# Altium PCB BLDC_Board_Layout.PcbDoc
Units mm, origin at the board's own origin, x right, y up, seen from the top; angles counter-clockwise.
Board outline 92.58 x 56.96 mm, 2 copper layers (Top Layer, Bottom Layer); 99 components, 78 nets, 395 pads, 357 vias.
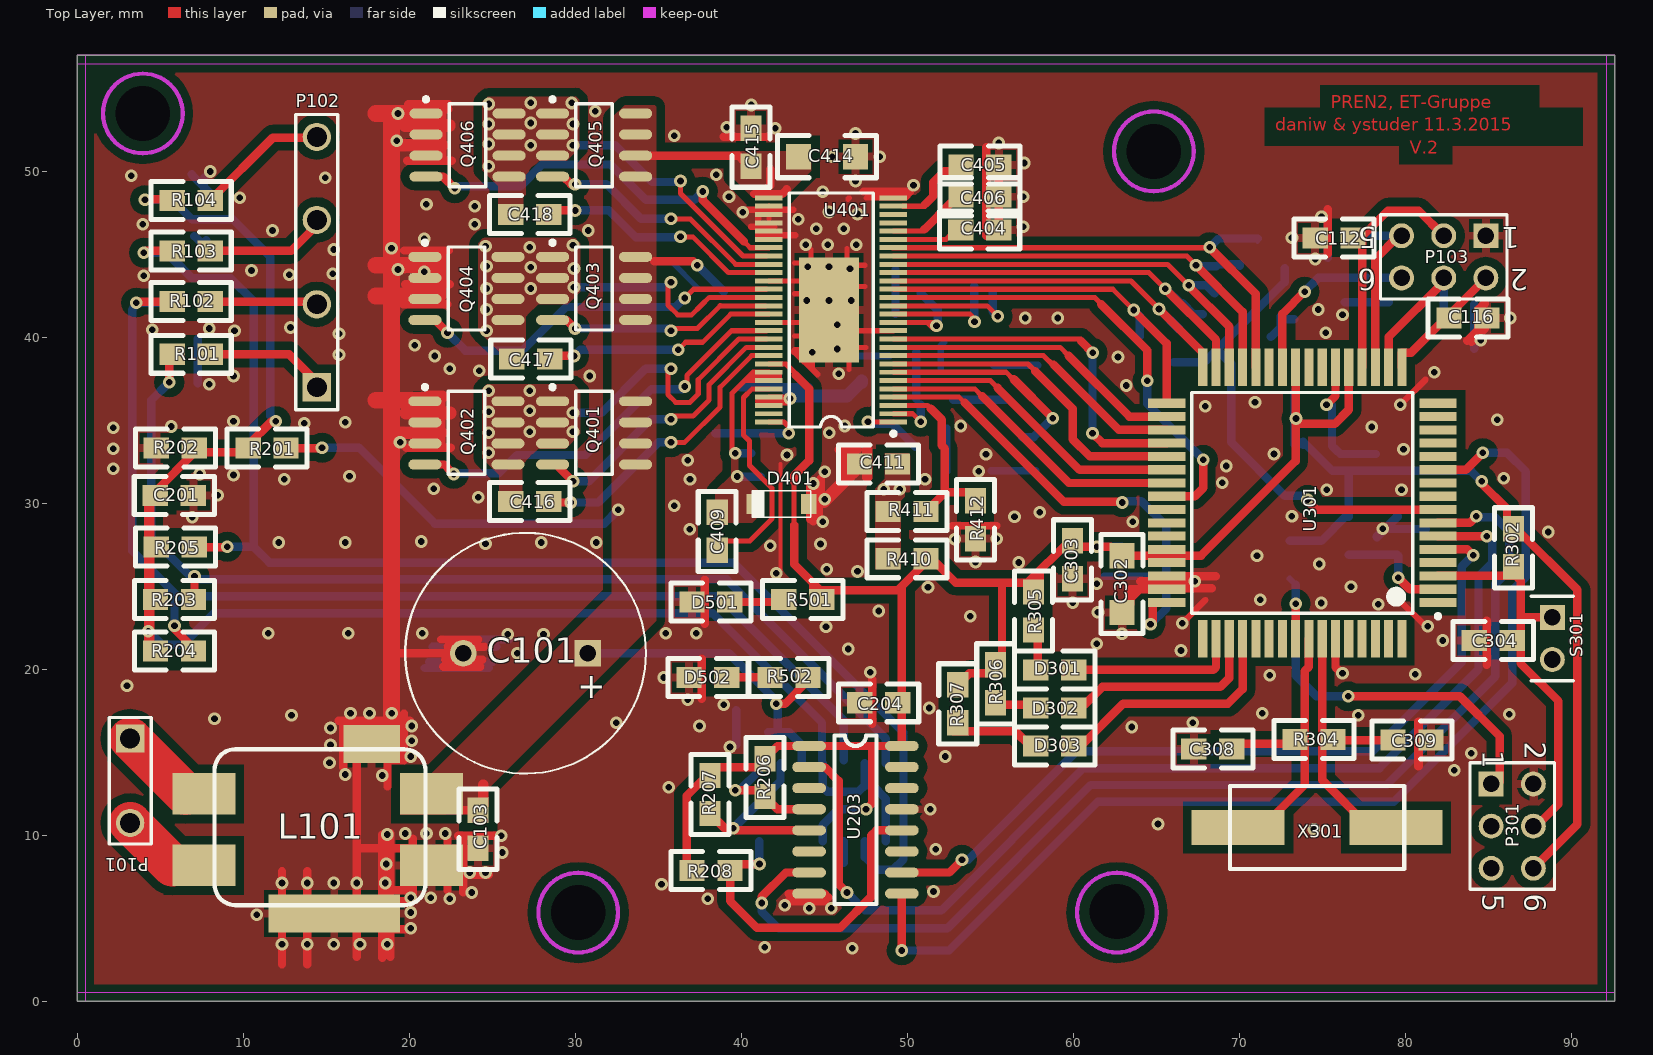
[diagram p0: Top Layer view]
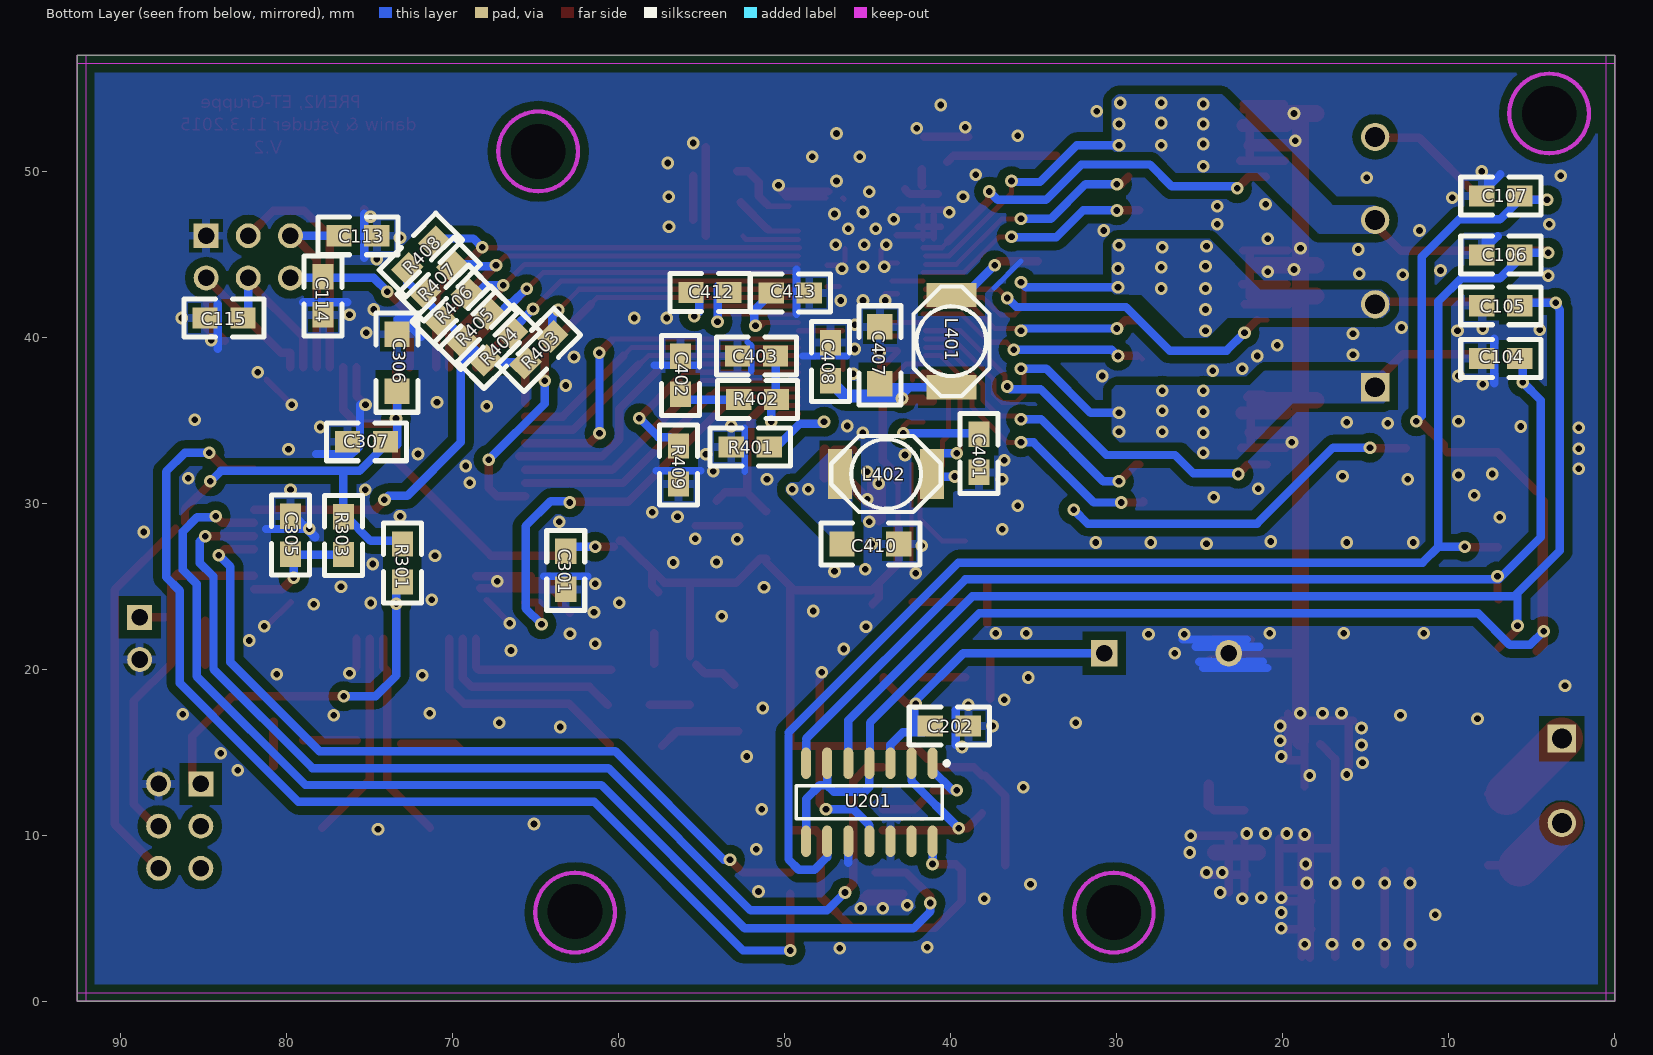
[diagram p1: Bottom Layer view, seen from below]

## Layer stack, top to bottom
Top Solder: solder mask 0.0102, Solder Resist, Dk 3.5
Top Layer: signal copper 0.0356
Dielectric 1: dielectric 0.32, FR-4, Dk 4.8
Bottom Layer: signal copper 0.0356
Bottom Solder: solder mask 0.0102, Solder Resist, Dk 3.5

## Board outline
0,0 0,56.959 92.583,56.959 92.583,0

## Design rules (kind name [scope] priority, off if disabled: settings)
Clearance HCS08 [(InComponent('U301')) and ispad vs (InComponent('U301')) and ispad] p1: gap=0.127
Clearance [All] p2: gap=0.508
ComponentClearance [All] p1 off: gap=0.254 collisioncheckmode=3 verticalgap=0.254 showdistances=FALSE
HoleSize [All] p1: absolutevalues=TRUE maxlimit=5.08 minlimit=0.025 maxpercent=80.000 minpercent=20.000
MinimumSolderMaskSliver [All] p1 off: minsoldermaskwidth=0.254
PasteMaskExpansion [All] p1 off: expansion=0
PolygonConnect SpecGND [InNamedPolygon('SpezGND') vs OnBottomLayer Or OnTopLayer] p1: connectstyle=Direct reliefconductorwidth=0.254 reliefentries=4 polygonreliefangle="90 Angle" airgapwidth=0.254
PolygonConnect PolygonConnect_M_X [InNet('M_W') or InNet('M_V') or InNet('M_U') or InNet('VCCH') or InNet('PWR_+') or InNet('PWR_-') or InNet('VCC_OUT') or InNet('NETC409_1') vs OnBottomLayer Or OnTopLayer] p2: connectstyle=Direct reliefconductorwidth=0.254 reliefentries=4 polygonreliefangle="90 Angle" airgapwidth=0.254
PolygonConnect PolygonConnect_Via [IsVia vs OnBottomLayer Or OnTopLayer] p3: connectstyle=Direct reliefconductorwidth=0.254 reliefentries=4 polygonreliefangle="90 Angle" airgapwidth=0.254
PolygonConnect PolygonConnect_1 [All] p4: connectstyle=Relief reliefconductorwidth=0.508 reliefentries=4 polygonreliefangle="90 Angle" airgapwidth=0.254
RoutingVias [All] p1: holewidth=0.711 width=0.711 viastyle="Through Hole" minholewidth=0.381 minwidth=0.711 maxholewidth=0.711 maxwidth=0.711
SilkToSilkClearance [All] p1 off: silktosilkclearance=0.254
SilkToSolderMaskClearance [IsPad] p1 off: minsilkscreentomaskgap=0.254 clearancetoexposedcopper=TRUE
SolderMaskExpansion [All] p1 off: expansion=0.102
UnpouredPolygon [All] p1: allowunpoured=FALSE
Width [All] p1: maxlimit=3.81 minlimit=0.305 preferedwidth=0.305
23 further rules are at their usual default settings.

## Components (designator, comment, footprint, x,y, rotation, side; value= is the part's Value field where it differs from the comment)
C101 "6800uF" CAPPA14.05-10.5x6.3 26.987,20.955 r180 top
C103 "100n" 0805 24.13,11.493 r270 top
C104 "100p" 0805 5.705,38.709 r0 bottom
C105 "100p" 0805 5.705,41.884 r0 bottom
C106 "100p" 0805 5.705,44.932 r0 bottom
C107 "100p" 0805 5.705,48.488 r0 bottom
C112 "240p" 0805 76.835,45.974 r180 top
C113 "240p" 0805 76.835,46.101 r180 bottom
C114 "240p" 0805 77.787,43.624 r270 bottom
C115 "240p" 0805 82.614,41.148 r0 bottom
C116 "240p" 0805 82.614,41.148 r0 top
C201 "1u" 0805 4.689,30.454 r0 top
C202 "100n" 0805 41.211,16.573 r180 bottom
C204 "100n" 0805 49.403,17.97 r180 top
C301 "100nF" 0805 63.173,27.088 r270 bottom
C302 "10uF" 1206 62.919,26.834 r270 top
C303 "100nF" 0805 59.934,27.723 r270 top
C304 "100nF" 0805 86.423,21.717 r180 top
C305 "100nF" 0805 79.756,26.924 r90 bottom
C306 "4.7uF" 1206 73.333,36.74 r90 bottom
C307 "470nF" 0805 74.031,33.692 r0 bottom
C308 "16pF" 0805 67.246,15.176 r0 top
C309 "16pF" 0805 81.524,15.722 r180 top
C401 "15n" 0805 38.278,31.851 r90 bottom
C402 "6.8n" 0805 56.251,36.55 r90 bottom
C403 "120p" 0805 50.536,38.862 r0 bottom
C404 "1u" 0805 53.203,46.456 r0 top
C405 "1u" 0805 53.213,50.355 r0 top
C406 "240p" 0805 53.213,48.45 r0 top
C407 "4.7uF" 1206 44.25,37.185 r90 bottom
C408 "100n" 0805 47.234,37.375 r90 bottom
C409 "100n" 0805 38.535,29.438 r270 top
C410 "4.7uF" 1206 46.536,27.533 r180 bottom
C411 "100n" 0805 49.393,32.359 r180 top
C412 "22n" 0805 55.626,42.672 r180 bottom
C413 "2.2u" 0805 50.79,42.646 r180 bottom
C414 "4.7uF" 1206 43.434,50.863 r0 top
C415 "100n" 0805 40.576,52.578 r270 top
C416 "100n" 0805 26.098,30.099 r0 top
C417 "100n" 0805 26.162,38.672 r0 top
C418 "100n" 0805 26.098,47.371 r0 top
D301 "LED" 0805 60.008,19.939 r180 top
D302 "LED" 0805 60.008,17.653 r180 top
D303 "LED" 0805 60.008,15.367 r180 top
D401 "MBR0560" SOD-123 42.408,29.946 r0 top
D501 "LED" 0805 37.011,24.04 r0 top
D502 "LED" 0805 36.83,19.494 r0 top
L101 "Filter" BNX 5.715,4.127 r0 top
L401 "1mH" SRR6603 39.941,39.751 r90 bottom
L402 "1mH" SRR6603 43.878,31.75 r0 bottom
P101 "PWR" Stecker_1x2_200mil 3.175,13.271 r270 top
P102 "Motor" Stecker_1x4_200mil 14.414,44.514 r90 top
P103 "Header 3X2" HDR2X3 84.836,46.101 r180 top
P301 "BDM" HDR2X3 85.153,13.081 r270 top
Q401 "Si4178DY" SO-8_N 31.115,34.227 r0 top
Q402 "Si4178DY" SO-8_N 23.431,34.227 r0 top
Q403 "Si4178DY" SO-8_N 31.115,42.926 r0 top
Q404 "Si4178DY" SO-8_N 23.431,42.926 r0 top
Q405 "Si4178DY" SO-8_N 31.115,51.562 r0 top
Q406 "Si4178DY" SO-8_N 23.495,51.562 r0 top
R101 "33" 0805 7.991,38.963 r180 top
R102 "33" 0805 7.991,42.138 r180 top
R103 "33" 0805 7.991,45.186 r180 top
R104 "33" 0805 7.991,48.234 r180 top
R201 "1M" 0805 10.277,33.311 r0 top
R202 "1M" 0805 4.753,33.311 r0 top
R203 "10k" 0805 4.699,24.194 r0 top
R204 "10k" 0805 4.699,21.082 r0 top
R205 "10k" 0805 4.753,27.342 r0 top
R206 "10k" 0805 41.402,12.319 r90 top
R207 "10k" 0805 38.1,11.303 r90 top
R208 "10k" 0805 39.306,7.874 r180 top
R301 "4.7k" 0805 73.015,27.533 r270 bottom
R302 "10k" 0805 86.487,28.448 r270 top
R303 "10k" 0805 76.571,29.184 r270 bottom
R304 "10M" 0805 73.343,15.748 r0 top
R305 "330" 0805 57.594,22.352 r90 top
R306 "330" 0805 55.308,17.97 r90 top
R307 "330" 0805 53.023,16.764 r90 top
R401 "150k" 0805 50.917,33.375 r0 bottom
R402 "16.2k" 0805 52.759,36.232 r180 bottom
R403 "10k" 0805 65.596,38.417 r135 bottom
R404 "10k" 0805 68.008,38.608 r135 bottom
R405 "10k" 0805 69.406,39.751 r135 bottom
R406 "10k" 0805 70.739,41.021 r135 bottom
R407 "10k" 0805 71.628,42.672 r135 bottom
R408 "10k" 0805 72.707,44.133 r135 bottom
R409 "0" 0805 56.378,31.152 r90 bottom
R410 "0" 0805 51.108,26.644 r180 top
R411 "30k" 0805 51.108,29.501 r180 top
R412 "10k" 0805 54.092,27.85 r90 top
R501 "330" 0805 42.545,24.194 r0 top
R502 "1.2k" 0805 41.719,19.494 r0 top
S301 "RST" HDR1X2 88.837,23.114 r270 top
U201 "LM339AD" D014_L 44.885,11.976 r270 bottom
U203 "MC74HC175" SO-16 44.069,15.367 r0 top
U301 "MC9S08JM60CQH" QFP64(14x14) 73.777,30.009 r180 top
U401 "DRV8301" HTSSOP56 45.266,41.63 r90 top
X301 "12MHz" HC/49US 74.666,10.451 r0 top

## Footprints (in the part's own frame and the unit in brackets; to place one, negate y for a bottom-side part, rotate by r counter-clockwise, add the part's x,y. Pads: shape width x height; smd on the part's side, far side on the other; paste and mask are expansions set on the pad)
0805 [mil]
  rect 60x50 smd: 1(0,0) 2(90,0)
  silkscreen extent -50,-45 140,45
1206 [mil]
  rect 60x60 smd: 1(0,0) 2(135,0)
  silkscreen extent -50,-50 185,50
BNX [mm]
  rect 3.8x2.5 smd: 1(1.9,8.35) 2(1.9,4.05) 4(15.6,4.05) 5(15.6,8.35)
  rect 7.9x2.3 smd: 3(9.75,1.15)
  rect 3.4x2.3 smd: 6(12,11.35)
  silkscreen extent 2.54,1.65 15.24,11.05
CAPPA14.05-10.5x6.3 [mm] "Capacitor, Electrolytic, Axial; Body 10.5 x 6.3 mm (LxDia. max), Lead Dia. 0.6 mm (typ)"
  rect 1.6x1.6 hole 1: 1(-3.75,0)
  round 1.6 hole 1: 2(3.75,0)
  silkscreen extent -7.25,-7.25 7.25,7.25
D014_L [mm] "SOIC, 14-Leads, Body 8.7x3.9mm, Pitch 1.27mm, IPC High Density"
  oval 1.9x0.6 smd: 1(-2.35,3.81) 2(-2.35,2.54) 3(-2.35,1.27) 4(-2.35,0) 5(-2.35,-1.27) 6(-2.35,-2.54) 7(-2.35,-3.81) 8(2.35,-3.81) 9(2.35,-2.54) 10(2.35,-1.27) 11(2.35,0) 12(2.35,1.27) 13(2.35,2.54) 14(2.35,3.81)
  silkscreen extent -2.47,-4.4 1,4.78, body extent -2,-4.38 2,4.38, height 1.75
HC/49US [mm] "ABLS HC/49US Quarz"
  rect 5.6x2.1 smd: 1(-4.75,0) 2(4.75,0)
  silkscreen extent -5.25,-2.5 5.25,2.5
HDR1X2 [mm] "Connector; Header; 2 Position"
  rect 1.5x1.5 hole 1: 1(0,0)
  round 1.5 hole 1: 2(2.54,0)
  silkscreen extent -1.27,-1.27 3.81,1.27
HDR2X3 [mm] "Connector; Header; 3x2 Position"
  rect 1.5x1.5 hole 1: 1(0,0)
  round 1.5 hole 1: 2(0,2.54) 3(2.54,0) 4(2.54,2.54) 5(5.08,0) 6(5.08,2.54)
  silkscreen extent -1.27,-1.27 6.35,3.81
HTSSOP56 [mm] "Shrink Small Outline; 56 Leads; Body Width 6.1 mm; Pitch 0.5 mm"
  rect 0.3x1.65 smd: 1(-6.75,-3.879) 2(-6.25,-3.879) 3(-5.75,-3.879) 4(-5.25,-3.879) 5(-4.75,-3.879) 6(-4.25,-3.879) 7(-3.75,-3.879) 8(-3.25,-3.879) 9(-2.75,-3.879) 10(-2.25,-3.879) 11(-1.75,-3.879) 12(-1.25,-3.879) 13(-0.75,-3.879) 14(-0.25,-3.879) 15(0.25,-3.879) 16(0.75,-3.879) 17(1.25,-3.879) 18(1.75,-3.879) 19(2.25,-3.879) 20(2.75,-3.879) 21(3.25,-3.879) 22(3.75,-3.879) 23(4.25,-3.879) 24(4.75,-3.879) 25(5.25,-3.879) 26(5.75,-3.879) 27(6.25,-3.879) 28(6.75,-3.879) 29(6.75,3.625) 30(6.25,3.625) 31(5.75,3.625) 32(5.25,3.625) 33(4.75,3.625) 34(4.25,3.625) 35(3.75,3.625) 36(3.25,3.625) 37(2.75,3.625) 38(2.25,3.625) 39(1.75,3.625) 40(1.25,3.625) 41(0.75,3.625) 42(0.25,3.625) 43(-0.25,3.625) 44(-0.75,3.625) 45(-1.25,3.625) 46(-1.75,3.625) 47(-2.25,3.625) 48(-2.75,3.625) 49(-3.25,3.625) 50(-3.75,3.625) 51(-4.25,3.625) 52(-4.75,3.625) 53(-5.25,3.625) 54(-5.75,3.625) 55(-6.25,3.625) 56(-6.75,3.625)
  rect 6.35x3.61 smd: 57(0,0)
  silkscreen extent -7.57,-4 7.05,2.41
QFP64(14x14) [mm] "QFP, 64-Leads, Body 17,5x17,5mm (max), Pitch 0,80mm, IPC Low Density"
  rect 2.25x0.55 smd: 1(-8.175,6) 2(-8.175,5.2) 3(-8.175,4.4) 4(-8.175,3.6) 5(-8.175,2.8) 6(-8.175,2) 7(-8.175,1.2) 8(-8.175,0.4) 9(-8.175,-0.4) 10(-8.175,-1.2) 11(-8.175,-2) 12(-8.175,-2.8) 13(-8.175,-3.6) 14(-8.175,-4.4) 15(-8.175,-5.2) 16(-8.175,-6) 33(8.175,-6) 34(8.175,-5.2) 35(8.175,-4.4) 36(8.175,-3.6) 37(8.175,-2.8) 38(8.175,-2) 39(8.175,-1.2) 40(8.175,-0.4) 41(8.175,0.4) 42(8.175,1.2) 43(8.175,2) 44(8.175,2.8) 45(8.175,3.6) 46(8.175,4.4) 47(8.175,5.2) 48(8.175,6)
  rect 0.55x2.25 smd: 17(-6,-8.175) 18(-5.2,-8.175) 19(-4.4,-8.175) 20(-3.6,-8.175) 21(-2.8,-8.175) 22(-2,-8.175) 23(-1.2,-8.175) 24(-0.4,-8.175) 25(0.4,-8.175) 26(1.2,-8.175) 27(2,-8.175) 28(2.8,-8.175) 29(3.6,-8.175) 30(4.4,-8.175) 31(5.2,-8.175) 32(6,-8.175) 49(6,8.175) 50(5.2,8.175) 51(4.4,8.175) 52(3.6,8.175) 53(2.8,8.175) 54(2,8.175) 55(1.2,8.175) 56(0.4,8.175) 57(-0.4,8.175) 58(-1.2,8.175) 59(-2,8.175) 60(-2.8,8.175) 61(-3.6,8.175) 62(-4.4,8.175) 63(-5.2,8.175) 64(-6,8.175)
  silkscreen extent -8.3,-6.65 6.65,6.95, body extent -7,-7 7,7, height 2.45
SO-8_N [mm] "SOIC, 8-Leads, Body 4.9x3.9mm, Pitch 1.27mm, IPC Medium Density"
  oval 2x0.6 smd: 1(-2.5,1.905) 2(-2.5,0.635) 3(-2.5,-0.635) 4(-2.5,-1.905) 5(2.5,-1.905) 6(2.5,-0.635) 7(2.5,0.635) 8(2.5,1.905)
  silkscreen extent -2.62,-2.5 1.1,2.88, body extent -2,-2.5 2,2.5, height 1.75
SO-16 [mil]
  oval 80x24 smd: 1(0,0) 2(0,-50) 3(0,-100) 4(0,-150) 5(0,-200) 6(0,-250) 7(0,-300) 8(0,-350) 9(220,-350) 10(220,-300) 11(220,-250) 12(220,-200) 13(220,-150) 14(220,-100) 15(220,-50) 16(220,0)
  silkscreen extent 60,-375 160,25
SOD-123 [mil]
  rect 36x48 smd: A(64.5,0) K(-64.5,0)
  silkscreen extent -69,-31 69,31
SRR6603 [mm]
  rect 1.45x3 smd: 1(-2.775,0) 2(2.775,0)
  silkscreen extent -3.3,-2.29 3.3,2.29
Stecker_1x2_200mil [mm]
  rect 1.7x1.7 hole 1.2: 1(-2.54,0)
  round 1.7 hole 1.2: 2(2.54,0)
  silkscreen extent -3.81,-1.27 3.81,1.27
Stecker_1x4_200mil [mm]
  rect 1.7x1.7 hole 1.2: 1(-7.54,0)
  round 1.7 hole 1.2: 2(-2.54,0) 3(2.54,0) 4(7.54,0)
  silkscreen extent -8.89,-1.27 8.89,1.27

## Part data
C101 C302 C306 C407 C410 C414: library part "C? ELKO", "Elektrolyt /polarisierter Kondensator"
C103 C104 C105 C106 C107 C112 C113 C114 C115 C116 C201 C202 C204 C301 C303 C304 C305 C307 C308 C309 C401 C402 C403 C404 C405 C406 C408 C409 C411 C412 C413 C415 C416 C417 C418: library part C?, "Normaler Kondensator"
D401: library part DiodeSchottky, "Schottky Diode"
L101: library part CommonFilter
L401 L402: library part L?, "SRR1005-122K"
P101 S301: library part "Header 2", "Header, 2-Pin"
P102: library part "Header 4", "Header, 4-Pin"
P103: "Header, 3-Pin, Dual row"
P301: library part "Header 3X2", "Header, 3-Pin, Dual row"
Q401 Q402 Q403 Q404 Q405 Q406: library part SI4412DY, "N-Channel 30V (D-S)  Rated MOSFET"
R101 R102 R103 R104 R201 R202 R203 R204 R205 R206 R207 R208 R301 R302 R303 R304 R305 R306 R307 R401 R402 R403 R404 R405 R406 R407 R408 R409 R410 R411 R412 R501 R502: library part R?, "Normaler Widerstand"
U201: "Quad Differential Comparator"
U203: "QUAD D-TYPE FF CR"
U301: library part MC9S08JM60, "MCU"
X301: library part CRYSTAL

## Free pads (board coordinates)
  round 1.524 hole 3.3 unplated: 1(3.937,53.467) 1(30.162,5.334) 1(62.611,5.397) 1(64.834,51.181)

## Via types
v1: diameter 0.762, hole 0.4, Top Layer to Bottom Layer, tented both sides, 286 vias
v2: diameter 0.762, hole 0.4, Top Layer to Bottom Layer, 71 vias

## Nets (pads, with @x,y where several pads share a name; then routed paths per layer and width w, separated by ;. In a path a pad name is that pad's centre, name@x,y a point inside that pad or via, vN(x,y) a via of type N, cw(c..) or ccw(c..) an arc to the next point about the centre after c; other vN are vias at no path point)
BCKGD: P301.1 R301.2 U301.56 | length 24.6
  Top Layer w0.508: U301.56 v1(73.377,23.932) ; v1(76.546,18.363) 83.264,18.363 85.661,15.966 P301.1@85.661,13.208
  Bottom Layer w0.381: R301.2@73.015,25.437 R301.2@73.377,25.075
  Bottom Layer w0.508: R301.2@73.377,25.075 v1(73.377,23.932) 73.377,19.614 74.628,18.363 v1(76.546,18.363)
CLK: C113.1 P103.5 U301.19 | length 11.1
  Top Layer w0.508: U301.19 78.177,44.713 P103.5@79.566,46.101
  Bottom Layer w0.508: C113.1 P103.5@79.438,46.101
CS: C112.1 P103.3 U301.20 | length 14.1
  Top Layer w0.508: U301.20 77.377,46.051 78.939,47.613 80.784,47.613 P103.3
DTC: R409.2 U401.7 | length 13
  Top Layer w0.305: U401.7 55.938,37.88 56.352,37.465
  Top Layer w0.508: 56.396,37.457 v1(58.737,35.115)
  Bottom Layer w0.508: R409.2@56.912,33.972 57.594,33.972 v1(58.737,35.115)
EN_GATE: U301.40 U401.16 | length 28.6
  Top Layer w0.305: U401.16 61.28,42.38 61.545,42.114
  Top Layer w0.508: 61.666,41.965 64.443,39.188 v1(64.443,37.375) ; U301.40 67.303,30.409 67.818,30.924 ; 67.808,30.924 v1(67.808,32.613)
  Bottom Layer w0.508: v1(64.443,37.375) 64.443,35.978 v1(67.808,32.613) v1@67.808,32.683
FET_H_U: R403.2 U301.33 U401.17 | length 23.2
  Top Layer w0.305: U401.17 62.367,42.88 v1@63.632,41.615
  Top Layer w0.508: v1(63.617,41.63) 63.617,41.601 65.602,39.616 U301.33
  Bottom Layer w0.508: v1(63.617,41.63) 63.979,41.268 R403.2
FET_H_V: R405.2 U301.31 U401.19 | length 26
  Top Layer w0.305: U401.19 64.542,43.88 v1(65.522,42.9)
  Top Layer w0.508: v1(65.522,42.9) 68.577,39.845 U301.31
  Bottom Layer w0.508: v1(65.522,42.9) 65.551,42.9 v1@65.786,42.665 ; v1@65.558,42.9 66.426,42.032 66.56,42.032 67.225,41.367 R405.2
FET_H_W: R407.2 U301.29 U401.21 | length 28.3
  Top Layer w0.305: U401.21 66.817,44.88 v1(67.373,44.323)
  Top Layer w0.508: v1(67.373,44.323) 70.177,41.519 U301.29
  Bottom Layer w0.508: v1(67.373,44.323) 67.437,44.259 68.589,44.259 ; 68.8,44.387 70.012,44.387 R407.2
FET_L_U: R404.2 U301.32 U401.18 | length 23.1
  Top Layer w0.305: U401.18 63.455,43.38 v1(65.141,41.693)
  Top Layer w0.508: v1(65.141,41.693) 67.777,39.057 U301.32
  Bottom Layer w0.508: v1(65.141,41.693) R404.2@66.392,40.442
FET_L_V: R406.2 U301.30 U401.20 | length 26
  Top Layer w0.305: U401.20 65.658,44.38 v1@66.925,43.113
  Top Layer w0.508: v1@66.922,43.116 v1(66.929,43.116) ; v1@66.929,43.08 69.377,40.632 U301.30
  Bottom Layer w0.508: v1@66.93,43.117 68.015,43.117 R406.2@68.495,42.637
FET_L_W: R408.2 U301.28 U401.22 | length 30.8
  Top Layer w0.305: U401.22@49.081,45.38 U401.22 v1@68.199,45.38
  Top Layer w0.508: v1@68.199,45.38 70.977,42.602 U301.28
  Bottom Layer w0.305: R408.2 R408.2@71.091,45.937
  Bottom Layer w0.508: v1(68.199,45.402) 68.733,45.937 R408.2@71.091,45.937
G_H_U: Q401.4 U401.47 | length 17.2
  Top Layer w0.305: v2(35.75,35.052) 35.941,35.242 37.084,35.242 38.052,36.21 38.052,37.147 40.285,39.38 U401.47@41.514,39.38
  Top Layer w0.508: Q401.4 28.829,32.322 v2(29.845,31.305)
  Bottom Layer w0.508: v2(29.845,31.305) 30.797,31.305 34.544,35.052 v2(35.75,35.052)
G_H_V: Q403.4 U401.42 | length 13.4
  Top Layer w0.305: v1@35.877,40.513 37.338,40.513 38.709,41.884 38.725,41.884 U401.42@41.45,41.88
  Top Layer w0.508: Q403.4 29.464,41.021 v1(29.972,40.513)
  Bottom Layer w0.508: v1(29.972,40.513) v1@35.623,40.513
  other v1: 35.75,40.386
G_H_W: Q405.4 U401.37 | length 14.4
  Top Layer w0.305: v2(35.75,47.117) 36.914,47.117 39.651,44.38 U401.37@41.514,44.38
  Top Layer w0.508: Q405.4@29.273,49.657 29.718,49.212 v2(29.972,49.212)
  Bottom Layer w0.508: v2(29.972,49.212) 31.861,49.212 33.956,47.117 v2(35.75,47.117)
G_L_U: Q402.4 U401.45 | length 24
  Top Layer w0.305: v2@36.703,37.338 36.703,37.689 39.394,40.38 U401.45@41.514,40.38
  Top Layer w0.508: Q402.4 22.098,32.322 v2@22.479,31.941
  Bottom Layer w0.508: v2@22.708,31.788 25.368,31.788 26.473,32.893 30.607,32.893 34.576,36.862 36.417,36.862 v2(36.576,37.02)
  other v2: 22.669,31.75
G_L_V: Q404.4 U401.40 | length 22.7
  Top Layer w0.305: Q404.4 Q404.4@21.526,41.021 ; v1(36.576,42.355) 37.101,42.88 U401.40@41.514,42.88
  Top Layer w0.508: Q404.4@21.526,41.021 v1@22.161,40.386
  Bottom Layer w0.508: v1(22.288,40.259) 23.368,39.179 26.797,39.179 29.426,41.808 36.03,41.808 v1(36.576,42.355)
G_L_W: Q406.4 U401.35 | length 24.3
  Top Layer w0.305: 40.122,45.777 40.519,45.38 U401.35
  Top Layer w0.508: Q406.4 22.034,49.657 v2(22.733,48.959) ; v2(37.655,48.768) 37.655,48.243 40.122,45.777
  Bottom Layer w0.508: v2(22.733,48.959) 22.86,49.085 26.677,49.085 27.985,50.394 32.117,50.394 34.25,48.26 37.147,48.26 v2(37.655,48.768)
GND: C101.2 C103.2 C104.2 C105.2 C106.2 C107.2 C112.2 C113.2 C114.2 C115.2 C116.2 C201.2 C202.2 C204.2 C301.2 C302.2 C303.2 C304.2 C305.2 C306.2 C307.2 C308.1 C309.1 C401.1 C402.2 C403.2 C404.2 C405.2 C406.2 C407.2 C408.2 C410.2 C411.2 C413.2 C414.2 C415.1 D401.A D501.1 D502.1 L101.3 L101.4 L101.6 P103.1 P301.2 Q402.1 Q402.2 Q402.3 Q404.1 Q404.2 Q404.3 Q406.1 Q406.2 Q406.3 R202.1 R401.2 R409.1 R412.1 S301.2 U201.10 U201.12 U203.8 U203.13 U301.22 U301.46 U301.47 U301.59 U401.12 U401.28 U401.30 U401.31 U401.32 U401.33 U401.34 U401.39 U401.44 U401.57 | length 365.3
  Top Layer w0.254: v1@42.345,25.908 42.345,32.359
  Top Layer w0.305: U401.44 U401.57@43.817,40.88 ; U401.39 U401.57@43.516,43.38 ; U401.34 U401.33 U401.32 U401.31 U401.30 ; 43.18,39.243 U401.57@43.942,39.243 ; 43.18,40.069 U401.57@43.942,40.069 ; 43.18,42.608 U401.57@43.942,42.608 ; 43.18,44.45 U401.57@43.942,44.45 ; U401.57@44.196,44.514 44.196,45.276 ; 44.259,38.163 U401.57@44.259,38.925 ; U401.57@46.355,44.577 46.355,45.339 ; 46.409,48.297 cw(c46.491,48.297) 46.491,48.38 ; 46.482,38.036 U401.57@46.482,38.798 ; U401.57@46.516,40.38 U401.12 ; U401.57@46.672,43.053 47.434,43.053 ; U401.57@46.672,44.323 47.434,44.323 ; U401.57@46.736,39.37 47.498,39.37 ; 47.491,48.38 U401.28 49.904,48.38 50.224,48.7
  Top Layer w0.381: v1@40.307,47.661 43.107,47.665 ; 40.572,46.65 41.969,46.65 ; U401.34@41.007,45.953 U401.31@41.007,47.35 ; 41.011,46.13 43.234,46.13 ; 43.159,39.153 44.556,37.756 ; v1(66.548,22.769) 67.945,24.166 ; 79.746,24.029 v1@81.143,22.632 ; v1@79.798,36.042 81.195,37.439
  Top Layer w0.455: 52.705,28.639 55.372,28.639
  Top Layer w0.47: 18.669,12.929 L101.6@18.669,15.755
  Top Layer w0.488: 37.782,22.733 37.782,25.4
  Top Layer w0.508: 12.319,2.222 12.319,7.81 ; 13.843,2.222 13.843,7.81 ; 15.746,16.881 v1@20.002,16.881 ; 16.002,14.097 16.002,16.891 ; 16.827,2.667 v1(16.827,7.112) 16.827,14.59 L101.6 ; 16.827,9.207 L101.4@19.939,9.207 ; L101.3@18.272,4.338 v1@19.732,4.338 ; L101.3@18.272,6.024 19.732,6.024 ; 18.351,2.603 v1@18.351,10.033 ; 18.542,6.673 20.113,6.673 ; L101.6@18.692,14.5 19.669,14.5 19.669,17.326 ; 18.843,2.673 v1@18.843,10.102 ; 18.915,21.082 19.042,20.955 C101.2 ; 19.621,41.974 22.288,41.974 ; 19.685,45.212 22.352,45.212 ; 19.748,43.18 22.415,43.18 ; 19.812,33.337 22.479,33.337 ; 19.875,50.609 22.542,50.609 ; 19.915,53.721 22.328,53.721 ; 19.915,54.032 22.328,54.032 ; v1@20.193,6.477 20.193,9.779 ; 21.145,36.512 22.001,36.512 22.128,36.386 ; 21.907,21.78 24.13,21.78 ; Q402.3@21.907,33.655 21.907,36.258 ; 21.971,42.418 21.971,45.021 ; Q406.3@21.971,50.927 Q406.1@21.971,53.53 ; 22.034,20.13 24.257,20.13 ; L101.4@22.161,7.62 v1@24.765,7.62 ; 22.161,20.574 24.384,20.574 ; 22.288,6.667 v1@22.288,9.779 ; 22.288,21.336 24.511,21.336 ; 22.923,9.97 v1(25.527,9.97) ; 23.241,6.54 23.241,9.842 ; 37.592,18.224 37.592,20.637 ; 38.925,52.07 41.592,52.07 ; v1@42.805,6.014 45.021,6.014 ; 42.845,6.477 U203.8 44.982,6.477 45.212,6.247 ; 44.132,29.019 v1@44.132,31.032 ; 44.323,28.892 44.323,30.057 v1(44.323,31.178) ; v1@44.64,29.083 44.64,30.375 ; v1@44.767,30.29 44.767,31.454 ; 45.847,33.21 46.99,33.21 ; 46.164,31.813 46.164,32.956 ; 47.371,48.768 50.038,48.768 ; 47.879,16.7 47.879,19.367 ; C404.2@54.737,46.101 54.737,51.435 ; C404.2@55.499,47.053 C405.2@55.499,49.721 ; C302.2 63.427,23.913 63.427,24.739 63.497,24.809 ; C302.2@63.309,24.13 64.151,24.972 ; 63.427,24.809 63.497,24.809 ; 64.008,25.301 v1(67.3,25.301) v1@67.228,25.372 ; U301.47@65.024,24.856 68.316,24.856 ; U301.46@65.267,25.592 68.559,25.592 ; U301.47 63.497,24.809 ; v1(75.238,35.915) 75.777,36.454 U301.22 ; 75.311,45.021 75.311,47.688 ; U301.59 75.777,20.108 v1@76.01,19.875 ; 83.717,39.775 C116.2@84.558,40.616 ; 83.971,39.711 C116.2@84.812,40.553 ; 84.9,20.256 84.9,22.924
  Top Layer w0.526: 80.772,14.16 80.772,16.828
  Top Layer w0.533: C116.2@84.391,40.513 84.391,41.656 84.749,42.013
  Top Layer w0.635: 47.561,31.547 47.561,33.21
  Top Layer w0.762: 19.24,34.227 21.907,34.227 ; v1@19.304,51.562 21.971,51.562 ; 19.732,52.738 22.399,52.738 ; 19.787,35.426 22.454,35.426 ; D401.A@44.323,30.057 44.64,30.375 ; D401.A@44.338,30.073 44.948,30.073 C411.2@47.234,32.359
  Top Layer w0.953: L101.4@21.463,8.954 C103.2@24.066,8.954
  Top Layer w1.016: 17.963,36.195 Q402.1@21.526,36.195 ; 17.963,42.481 Q404.3@21.526,42.481 ; 17.963,44.323 21.526,44.323 ; 17.963,53.467 Q406.1@21.526,53.467 ; L101.6@18.915,15.621 18.915,21.082 v1(18.915,45.339) 18.915,53.467
  Bottom Layer w0.305: 35.75,44.577 37.38,42.947
  Bottom Layer w0.399: 52.006,37.973 52.006,39.481 52.213,39.688 ; 52.387,31.877 52.387,34.544
  Bottom Layer w0.432: 46.228,38.862 48.895,38.862
  Bottom Layer w0.445: 55.181,38.291 57.848,38.291 ; 61.849,25.59 64.516,25.59
  Bottom Layer w0.452: 55.054,31.941 57.721,31.941
  Bottom Layer w0.478: v1@78.549,28.433 81.216,28.433
  Bottom Layer w0.488: 49.276,41.402 49.276,44.069
  Bottom Layer w0.495: 76.073,32.956 78.222,32.956
  Bottom Layer w0.508: 6.871,49.797 7.991,48.676 C107.2 ; 7.037,46.075 7.991,45.12 C106.2 ; C107.2@7.62,48.323 7.62,49.593 ; C106.2@7.747,44.932 7.747,45.821 ; 20.928,20.066 24.765,20.066 ; 21.182,20.447 25.019,20.447 ; 21.382,21.355 25.219,21.355 ; 22.161,21.78 v1@25.998,21.78 ; 39.687,15.43 39.687,17.526 ; 46.155,8.322 U201.10 ; 71.882,40.005 71.882,40.009 72.489,40.616 72.489,41.247 ; 72.651,41.084 73.279,41.084 ; 75.311,44.767 75.311,47.434 ; v1@75.565,35.915 75.565,33.438 75.834,33.183 76.073,32.956 ; 76.327,42.1 78.994,42.1 ; 84.138,39.306 84.138,41.974
  Bottom Layer w0.521: 7.239,37.211 7.239,39.878
  Bottom Layer w0.559: 78.272,27.964 C305.2@79.492,29.184
  Bottom Layer w0.762: C407.2 44.186,40.677 C407.2@44.25,40.741
  other v1: 46.672,3.175 41.402,3.238 12.319,3.429 13.843,3.429 15.43,3.429 17.018,3.429 18.669,3.429 20.066,4.381 10.795,5.207 20.066,5.334 44.069,5.588 45.402,5.588 42.608,5.779 22.415,6.159 37.973,6.159 20.066,6.223 21.272,6.223 23.749,6.54 51.562,6.604 35.179,7.048 12.319,7.112 13.843,7.112 15.43,7.112 18.542,7.112 23.622,7.747 24.574,7.747 18.605,8.255 25.59,8.954 51.689,9.144 18.669,10.033 19.748,10.096 21.018,10.096 22.161,10.096 74.486,10.351 65.087,10.668 51.371,11.557 35.623,12.89 18.351,13.589 16.129,13.652 82.931,13.906 15.176,14.351 20.066,14.732 52.261,14.732 83.947,14.922 39.306,15.303 15.24,15.43 20.129,15.684 15.24,16.447 63.5,16.51 20.129,16.573 37.465,16.573 32.448,16.764 67.183,16.764 8.255,17.018 12.89,17.209 77.153,17.209 86.233,17.272 16.446,17.335 17.589,17.335 18.923,17.335 71.374,17.335 51.308,17.653 38.925,17.843 36.766,18.161 2.984,18.986 35.306,19.494 71.819,19.621 80.581,19.685 76.2,19.748 47.752,19.812 26.479,20.955 66.475,21.119 46.418,21.209 61.404,21.526 82.233,21.717 25.908,22.098 28.067,22.098 62.919,22.135 11.493,22.162 16.319,22.162 20.764,22.162 35.433,22.162 37.274,22.162 45.085,22.543 81.334,22.58 53.785,23.177 61.468,23.431 48.26,23.495 78.349,23.913 74.92,23.977 59.944,24.003 71.237,24.167 51.235,24.929 76.708,24.956 61.404,25.146 42.1,25.781 46.98,25.882 45.139,26.015 74.793,26.326 56.706,26.416 54.092,26.453 71.047,26.834 41.719,27.432 44.758,27.533 24.574,27.559 12.128,27.622 16.129,27.622 27.94,27.622 31.242,27.622 20.701,27.686 52.832,27.813 55.362,27.85 88.582,28.258 36.884,28.422 78.613,28.448 44.885,28.866 63.554,28.866 6.921,29.146 56.442,29.184 73.152,29.21 57.966,29.438 35.941,29.845 45.021,30.226 8.445,30.48 75.248,30.797 79.756,30.797 68.951,31.216 12.446,31.432 36.893,31.432 51.054,31.432 85.915,31.496 16.383,31.623 9.398,31.686 7.366,31.75 45.021,31.877 54.283,31.914 2.159,32.067 69.205,32.232 36.766,32.575 42.735,32.893 54.727,32.93 72.072,32.956 79.873,33.248 2.159,33.274 19.431,33.655 45.275,34.227 2.159,34.544 77.968,34.581 5.651,34.608 46.218,34.645 53.203,34.645 9.398,34.925 85.525,35.026 67.935,35.84 79.683,35.915 70.929,36.068 63.182,37.084 9.398,37.655 30.861,37.655 45.847,37.782 81.715,37.883 62.674,38.798 44.25,39.09 45.774,39.28 84.519,39.814 75.184,40.259 9.461,40.386 12.827,40.576 45.774,40.741 57.087,41.148 59.055,41.148 86.296,41.148 76.2,41.338 74.739,41.656 43.932,42.201 45.266,42.201 46.599,42.201 12.763,43.752 20.891,43.942 19.304,44.069 46.536,44.106 43.996,44.233 45.266,44.233 74.549,44.704 15.43,45.276 43.869,45.567 45.202,45.567 46.917,45.567 20.891,45.91 73.152,45.974 11.747,46.419 30.759,46.419 44.504,46.519 46.155,46.519 56.95,46.646 43.424,47.091 74.93,47.244 46.98,47.408 40.068,47.516 45.266,47.535 39.243,48.45 56.959,48.45 44.885,48.742 50.355,49.149 46.863,49.403 57.023,50.482 45.466,50.863 48.323,50.863 55.499,51.689 19.24,51.816 35.941,52.133 46.863,52.261 42.037,52.578 39.116,52.642 19.304,53.467 31.178,53.594 40.576,53.975
  other v2: 24.13,30.353 21.463,30.861 13.652,34.798 16.129,34.861 7.938,37.148 24.193,37.973 22.415,38.1 21.526,38.862 15.748,38.925 20.32,39.497 15.748,40.195 4.508,40.45 7.938,40.513 4,43.688 15.367,43.815 10.477,44.005 3.937,46.799 23.939,46.799 23.939,47.879 21.018,48.006 9.779,48.387 14.922,49.593 3.238,49.721 38.481,49.784 8.001,49.974
HALL_U: U203.2 U301.6 | length 65
  Top Layer w0.508: U203.2 45.019,14.097 45.85,13.265 45.85,7.045 v1(46.355,6.54) ; U301.6 v1(84.894,28.009)
  Bottom Layer w0.508: v1(46.355,6.54) 47.434,5.461 52.035,5.461 60.608,14.034 78.433,14.034 84.391,19.992 84.391,25.597 84.427,25.597 85.217,26.387 85.217,27.686 v1(84.894,28.009)
HALL_V: U203.7 U301.7 | length 69.7
  Top Layer w0.508: v1(41.211,5.905) 41.211,6.286 42.672,7.747 U203.7 U203.7@44.513,7.747 ; U301.7 83.864,28.809 v1(84.264,29.21)
  Bottom Layer w0.508: v1(41.211,5.905) 41.211,5.404 42.234,4.381 52.393,4.381 61.029,13.018 78.854,13.018 85.407,19.571 85.407,25.141 86.233,25.966 86.233,28.286 85.367,29.152 84.322,29.152 v1(84.264,29.21) 84.264,29.171 v1@84.308,29.127
HALL_W: U203.10 U301.5 | length 48
  Top Layer w0.508: U203.10 52.514,7.747 v1(53.276,8.509) ; U301.5 83.725,27.209 v1(84.074,26.86)
  Bottom Layer w0.508: v1(53.276,8.509) 53.647,8.509 60.187,15.05 78.013,15.05 83.376,20.412 83.376,26.162 v1(84.074,26.86)
IRQ: C114.1 P103.6 U301.26 | length 11.3
  Top Layer w0.508: U301.26 72.577,41.399 v1(73.914,42.735)
  Bottom Layer w0.508: v1(73.914,42.735) 74.739,43.561 P103.6
IRQ/TPMCLK: C305.1 R303.2 U301.2 | length 7
  Top Layer w0.508: v1(79.556,25.501) 80.247,24.809 U301.2
  Bottom Layer w0.508: R303.2 79.492,26.898 79.556,26.834 v1(79.556,25.501)
LED0: D301.1 U301.50 | length 9.9
  Top Layer w0.508: D301.1@60.444,19.947 68.414,19.947 68.577,20.11 U301.50
LED1: D302.1 U301.51 | length 11.8
  Top Layer w0.508: D302.1@60.642,17.843 61.73,18.931 68.835,18.931 69.353,19.45 69.377,19.45 U301.51
LED2: D303.1 U301.52 | length 14.1
  Top Layer w0.508: D303.1@60.511,15.435 62.992,17.915 69.303,17.915 70.177,18.789 U301.52
LED_3V3: D501.2 R501.1 | length 3
  Top Layer w0.508: D501.2 R501.1@42.281,24.04
LED_HV: D502.2 R502.1 | length 2.6
  Top Layer w0.508: D502.2 R502.1
M_U: C416.1 P102.1 Q401.1 Q401.2 Q401.3 Q402.5 Q402.6 Q402.7 Q402.8 R101.1 U401.46 | length 24.5
  Top Layer w0.305: v2(35.75,38.1) 35.56,37.91 35.56,36.536 36.028,36.068 36.893,36.068 37.392,36.566 37.392,37.433 39.838,39.88 U401.46@41.514,39.88
  Top Layer w0.508: R101.1 12.743,38.963 P102.1@14.732,36.973
  Bottom Layer w0.508: v2(29.845,35.433) 31.559,35.433 34.226,38.1 v2(35.75,38.1)
  other v2: 24.765,33.02 24.765,34.227 27.241,34.29 29.845,34.29 24.765,35.496 27.241,35.56 24.765,36.767 27.241,36.767
M_U_CMP: R206.1 U201.1 U203.4 | length 6.8
  Top Layer w0.508: v1(39.624,12.7) R206.1@41.021,12.7 ; R206.1 42.164,11.557 U203.4
  Bottom Layer w0.508: v1(39.624,12.7) 39.878,12.7 41.075,13.897 U201.1
M_U_FILT: C104.1 R101.2 R203.2 U201.7 | length 65.1
  Top Layer w0.508: v2(5.524,37.274) 5.524,38.782 R101.2 ; R203.2 7.048,24.257 v2(7.048,25.59)
  Bottom Layer w0.508: C104.1@5.424,38.836 5.524,38.735 v2(5.524,37.274) 4.435,36.185 4.435,27.95 6.985,25.4 39.098,25.4 48.695,15.803 ; U201.7 48.695,15.613
M_V: C417.1 P102.2 Q403.1 Q403.2 Q403.3 Q404.5 Q404.6 Q404.7 Q404.8 R102.1 U401.41 | length 20.5
  Top Layer w0.305: v1@35.56,43.053 35.56,41.934 36.155,41.338 36.997,41.338 37.592,41.934 38.057,42.395 U401.41@41.514,42.38
  Top Layer w0.508: R102.1 14.568,42.138 P102.2@14.732,41.974
  Bottom Layer w0.508: v1(29.908,42.989) 35.433,42.989 v1@35.739,43.295
  other v1: 24.638,40.386 24.638,41.656 24.638,42.926 27.305,42.926 35.75,43.307 29.908,44.133 27.305,44.196 24.638,44.259 27.241,45.402 24.574,45.466 29.845,45.529
M_V_CMP: R207.1 U201.2 U203.5 | length 11.5
  Top Layer w0.508: R207.1 38.989,10.414 v1(39.497,10.414) 39.624,10.287 U203.5
  Bottom Layer w0.508: v1(39.497,10.414) 42.345,13.262 U201.2
M_V_FILT: C105.1 R102.2 R204.2 U201.5 | length 72.8
  Top Layer w0.508: v2(3.546,42.074) 3.61,42.138 R102.2 ; v2(5.842,22.606) 5.842,22.414 R204.2@6.985,21.271
  Bottom Layer w0.508: v2(5.842,22.606) 5.842,24.575 ; C105.1@5.896,42.074 v2(3.546,42.074) 3.302,41.64 3.302,27.114 5.842,24.575 ; U201.5@46.155,14.517 46.155,16.906 38.677,24.384 6.032,24.384 5.842,24.575
M_W: C418.1 P102.3 Q405.1 Q405.2 Q405.3 Q406.5 Q406.6 Q406.7 Q406.8 R103.1 U401.36 | length 22.4
  Top Layer w0.305: v2(36.322,49.403) 36.322,48.643 40.085,44.88 U401.36@41.514,44.88
  Top Layer w0.508: R103.1 12.864,45.186 P102.3@14.732,47.053
  Bottom Layer w0.508: v2(29.845,51.562) 32.385,51.562 34.607,49.34 36.258,49.34 v2(36.322,49.403)
  other v2: 24.765,50.292 27.305,51.562 24.765,51.625 24.765,52.832 29.845,52.832 27.305,52.895 24.765,54.038 27.305,54.102 29.781,54.102
M_W_CMP: R208.1 U201.14 U203.12 | length 20.8
  Top Layer w0.508: v1(41.084,8.255) 39.687,8.255 R208.1 39.306,6.032 40.932,4.407 45.935,4.407 47.815,6.287 47.815,9.977 48.126,10.287 U203.12
  Bottom Layer w0.508: v1@41.075,8.265 U201.14
M_W_FILT: C106.1 R103.2 R205.2 U201.9 | length 83.1
  Top Layer w0.508: v2(4,45.085) 4.101,45.186 R103.2 ; R205.2 v2@8.991,27.342
  Bottom Layer w0.508: v2(4,45.085) 5.552,45.085 C106.1 5.705,44.743 6.913,43.535 9.234,43.535 10.604,42.164 10.604,27.368 ; v2(9.017,27.368) 10.604,27.368 ; U201.9 47.425,8.678 48.188,7.914 49.134,7.914 49.757,8.536 49.757,15.987 ; 49.757,16.178 39.518,26.416 11.557,26.416 10.604,27.368
MISO: C116.1 P103.2 U301.17 | length 7.8
  Top Layer w0.508: U301.17 79.777,39.052 80.328,39.052 P103.2
MOSI: C115.1 P103.4 U301.18 | length 9.2
  Top Layer w0.508: U301.18 78.977,40.005 82.296,43.324 P103.4
  Bottom Layer w0.508: C115.1@82.296,41.148 P103.4
NetC308_2: C308.2 R304.1 U301.57 X301.1 | length 16.2
  Top Layer w0.508: C308.2 69.85,15.494 R304.1@73.088,15.494 ; X301.1@71.348,10.451 73.914,13.018 73.914,19.875 74.177,20.139 U301.57
NetC309_2: C309.2 R304.2 U301.58 X301.2 | length 15.8
  Top Layer w0.508: U301.58 74.977,13.309 X301.2@77.835,10.451 ; R304.2@75.746,15.722 C309.2@78.984,15.722
NetC401_2: C401.2 U401.56 | length 6.2
  Top Layer w0.305: U401.56 42.554,34.88 42.853,34.581 v1(42.853,34.2)
  Bottom Layer w0.508: C401.2@38.408,34.2 v1(42.853,34.2)
NetC402_1: C402.1 R402.1 | length 3.2
  Bottom Layer w0.508: R402.1 C402.1@55.934,36.232
NetC403_1: C403.1 R402.2 U401.2 | length 6.1
  Top Layer w0.305: U401.2 50.309,35.38 v1(50.79,34.899)
  Bottom Layer w0.305: R402.2 R402.2@50.79,35.915
  Bottom Layer w0.508: R402.2@50.536,36.296 C403.1@50.536,39.09 ; v1(50.79,34.899) R402.2@50.79,35.915
NetC404_1: C404.1 U401.23 | length 3.4
  Top Layer w0.305: U401.23 52.31,45.88 C404.1@52.505,46.075
NetC405_1: C405.1 U401.27 | length 4.4
  Top Layer w0.305: U401.27@49.716,47.88 51.044,47.88
  Top Layer w0.508: 51.072,48.015 51.552,48.495 51.552,49.33 52.197,49.974 C405.1@52.832,49.974
NetC409_1: C409.1 D401.K L402.1 U401.50 U401.51 | length 12.1
  Top Layer w0.305: v1@39.424,33.057 39.424,36.613 40.69,37.88 U401.50 ; 40.308,37.38 U401.51 ; 40.626,37.655 42.291,37.655 ; U401.51@42.291,37.401 U401.50@42.291,37.831
  Bottom Layer w0.508: v1(39.614,32.994) L402.1@40.586,32.994 ; v1(39.741,31.597) L402.1@41.157,31.597
NetC409_2: C409.2 U401.52 | length 13
  Top Layer w0.305: C409.2@39.106,27.723 40.503,27.723 41.837,29.057 41.837,30.898 40.478,32.257 40.478,33.733 40.122,34.088 40.122,36.359 40.643,36.88 U401.52
NetC412_1: C412.1 U401.15 | length 8.2
  Top Layer w0.305: U401.15 54.795,41.88 v1(55.426,41.249)
  Bottom Layer w0.508: C412.1@55.118,42.735 55.118,41.556 v1(55.426,41.249)
NetC412_2: C412.2 U401.14 | length 7.4
  Top Layer w0.305: U401.14 53.771,41.38 v1@54.219,40.931
  Bottom Layer w0.508: v1(54.029,40.931) C412.2@54.029,43.053
NetC413_1: C413.1 U401.13 | length 7.2
  Top Layer w0.305: U401.13 51.195,40.88 51.498,40.576 v1@51.642,40.576 ; U401.13@49.653,40.88 v1@51.703,40.88
  Top Layer w0.508: v1@51.642,40.576 v1(51.743,40.677)
  Bottom Layer w0.508: C413.1 51.806,41.63 51.806,40.741 v1(51.743,40.677)
NetC416_2: C416.2 U401.48 | length 17.6
  Top Layer w0.305: v2(29.718,30.035) v2@29.718,30.099 ; v2(35.75,33.655) 36.576,33.655 38.712,35.791 38.712,36.982 40.611,38.88 U401.48@41.514,38.88
  Top Layer w0.508: C416.2@28.384,30.035 C416.2@28.448,30.035 ; C416.2 C416.2@28.448,30.035 ; v2(29.718,30.035) C416.2@28.448,30.035
  Bottom Layer w0.508: v2(29.718,30.035) 31.369,30.035 34.988,33.655 v2(35.75,33.655)
NetC417_2: C417.2 U401.43 | length 14.3
  Top Layer w0.305: C417.2 C417.2@28.702,38.925 ; v1(36.195,39.243) 36.639,39.688 37.655,39.688 39.348,41.38 U401.43
  Top Layer w0.508: C417.2@28.765,38.862 v1(29.908,38.862)
  Bottom Layer w0.508: v1(29.908,38.862) 30.289,39.243 v1(36.195,39.243)
NetC418_2: C418.2 U401.38 | length 14.6
  Top Layer w0.305: v2(36.322,46.038) 37.06,46.038 39.217,43.88 U401.38
  Top Layer w0.508: C418.2@28.638,47.625 v2(29.972,47.625)
  Bottom Layer w0.508: v2(29.972,47.625) 32.011,47.625 33.637,45.999 36.284,45.999 v2(36.322,46.038)
NetD301_2: D301.2 R305.1 | length 1.8
  Top Layer w0.508: D301.2@57.848,20.32 R305.1@57.848,22.162
NetD302_2: D302.2 R306.1 | length 2.4
  Top Layer w0.508: R306.1@55.689,17.843 D302.2@58.102,17.843
NetD303_2: D303.2 R307.1 | length 5
  Top Layer w0.508: R307.1@52.768,16.256 56.483,16.256 D303.2@57.372,15.367
NetR401_1: R401.1 U401.1 | length 5
  Top Layer w0.305: v1@47.66,34.88 U401.1
  Bottom Layer w0.508: v1(47.615,34.899) 47.729,34.785 49.063,34.785 R401.1@50.473,33.375
NFAULT: U301.38 U401.6 | length 18.7
  Top Layer w0.305: U401.6 54.984,37.38 55.423,36.94
  Top Layer w0.508: 55.423,36.94 60.362,32.001 ; 60.37,32.009 U301.38
NOCTW: U301.39 U401.5 | length 18.8
  Top Layer w0.305: U401.5 54.047,36.88 54.488,36.438
  Top Layer w0.508: 54.488,36.438 59.717,31.209 U301.39
PWM: R403.1 R404.1 R405.1 R406.1 R407.1 R408.1 U301.8 | length 29.2
  Top Layer w0.508: v1@74.095,30.136 74.622,29.609 U301.8
  Bottom Layer w0.508: R403.1@66.033,38.475 R404.1@67.875,38.475 ; R404.1 72.707,43.307 R408.1 ; 69.484,38.402 69.484,33.667 72.723,30.428 73.866,30.428 v1(74.095,30.2)
  Bottom Layer w0.559: 68.739,39.148 69.437,38.449
PWM_N: U203.9 U301.11 | length 65.9
  Top Layer w0.508: v1(49.657,3.048) U203.9 ; U301.11 83.635,32.009 v1(84.645,33.02)
  Bottom Layer w0.508: v1@49.847,3.048 52.496,3.048 61.45,12.002 79.275,12.002 82.277,15.003 86.423,19.15 86.423,24.72 87.249,25.545 87.249,31.895 86.124,33.02 v1(84.645,33.02)
PWR_+: L101.1 P101.1 | length 5.8
  Top Layer w0.508: L101.1@6.509,12.477 L101.1
  Top Layer w2.54: P101.1 L101.1@6.509,12.477
PWR_-: L101.2 P101.2 | length 5.5
  Top Layer w0.508: L101.2@5.729,8.177 L101.2
  Top Layer w2.54: P101.2 L101.2@5.729,8.177
PWRGD: U301.48 U401.4 | length 28
  Top Layer w0.305: U401.4 53.11,36.38 53.452,36.037
  Top Layer w0.508: 53.452,36.037 59.417,30.073 v1@62.891,30.073 ; v1@64.77,22.707 64.77,24.009 U301.48
  Bottom Layer w0.508: v1@63.004,30.111 64.087,30.111 65.586,28.612 65.586,23.659 v1(64.633,22.707)
  other v1: 62.928,30.035
R\S\T\: C304.1 P301.4 R302.2 S301.1 U301.3 | length 23.5
  Top Layer w0.508: U301.3 R302.2@86.595,25.609 ; R302.2@86.487,25.781 86.931,25.336 86.931,23.114 ; P301.4@87.884,10.541 89.206,11.863 89.206,18.067 86.931,20.341 86.931,23.114 ; S301.1 86.931,23.114
REF: C406.1 U401.24 | length 4.2
  Top Layer w0.305: U401.24 51.012,46.38
  Top Layer w0.508: 51.012,46.488 C406.1@52.632,48.107
SPI_CLK: U301.36 U401.11 | length 21.8
  Top Layer w0.305: U401.11 60.452,39.88
  Top Layer w0.508: 60.452,39.751 v1(61.151,39.052) ; v1(61.141,34.2) 61.732,33.609 U301.36
  Bottom Layer w0.508: v1(61.141,34.2) v1@61.141,38.989
SPI_CS: U301.37 U401.8 | length 20.2
  Top Layer w0.305: U401.8 57.256,38.38 57.7,37.935
  Top Layer w0.508: 57.7,37.935 59.944,35.692 59.944,33.846 60.98,32.809 U301.37 U301.37@65.983,32.809
SPI_DSI: U301.35 U401.9 | length 18.3
  Top Layer w0.305: U401.9 58.193,38.88 58.76,38.313
  Top Layer w0.508: 58.791,38.344 62.727,34.409 U301.35
SPI_DSO: U301.34 U401.10 | length 18.2
  Top Layer w0.305: U401.10 59.193,39.38 59.7,38.872
  Top Layer w0.508: 59.7,38.872 63.363,35.209 U301.34
STERNP: C107.1 C201.1 R104.2 R201.1 R202.2 R203.1 R204.1 R205.1 U201.4 U201.6 U201.8 | length 94.8
  Top Layer w0.508: v2(4.064,48.26) 4.064,48.297 R104.2@5.324,48.297 ; R204.1@4.318,21.463 R204.1 ; C201.1@4.689,30.708 7.039,33.057 R201.1@10.087,33.057 ; R201.1 10.277,33.5 11.702,34.925 v2(11.938,34.925)
  Top Layer w0.635: R204.1@4.318,21.463 C201.1@4.318,30.083
  Bottom Layer w0.508: v2(4.064,48.26) 5.715,48.26 6.858,47.117 6.887,47.117 6.913,47.091 9.308,47.091 9.335,47.117 11.62,44.831 11.62,35.242 v2(11.938,34.925) ; v2(4.255,22.288) 5.08,21.463 6.315,21.463 8.22,23.368 38.256,23.368 44.846,16.777 U201.4@44.846,14.555 ; U201.4@44.846,14.364 U201.4 44.885,12.893 45.163,12.614 47.04,12.614 47.425,12.999 ; U201.6 47.425,12.999 ; U201.8 48.695,12.174 47.87,12.999 47.425,12.999
STERNP_EXT: P102.4 R104.1 | length 8.3
  Top Layer w0.508: R104.1 11.764,52.006 14.685,52.006 P102.4@14.732,52.054
VCC: C204.1 C301.1 C302.1 C303.1 C306.1 C307.1 P301.6 R206.2 R207.2 R208.2 R301.1 R302.1 R303.1 R305.2 R306.2 R307.2 R410.1 R501.2 U201.11 U203.1 U203.16 U301.21 U301.25 U301.44 U301.45 U401.49 | length 153.9
  Top Layer w0.305: U401.49 42.674,38.38 43.316,37.737 ; 43.17,28.678 43.17,31.279
  Top Layer w0.508: R208.2@36.703,8.191 36.703,12.381 37.911,13.589 R207.2 38.608,14.097 R206.2@40.894,14.097 ; R206.2 42.164,15.367 U203.1 47.974,15.367 ; 43.17,28.678 43.17,26.326 44.758,24.739 49.391,24.739 49.657,25.005 ; 43.17,31.279 43.17,31.66 ; 43.234,31.724 44.069,32.559 44.069,36.896 43.272,37.693 ; 44.323,25.173 44.323,24.284 R501.2@44.694,23.913 ; v1(47.498,11.557) 47.879,11.938 47.879,15.272 47.974,15.367 ; U203.16 47.974,15.367 ; U203.16@49.657,15.557 49.657,25.005 ; R410.1@51.108,26.455 49.657,25.005 ; R410.1 51.461,26.644 52.895,25.209 R305.2@57.15,25.209 ; R307.2 53.721,19.748 54.8,19.748 R306.2 ; R306.2@55.689,20.764 55.689,25.082 ; R305.2@57.232,25.209 59.745,27.723 C303.1 ; R305.2 57.975,25.019 57.975,25.845 ; C303.1@60.289,27.368 v1(61.404,27.368) C302.1@62.23,27.368 ; 63.681,26.834 67.681,26.834 73.377,32.53 v1@73.377,34.772 ; U301.25 v1@73.377,34.772 ; U301.21 76.577,35.62 75.729,34.772 v1@73.377,34.772 ; v1(84.582,31.305) 84.582,31.178 86.106,29.654 R302.1@86.106,28.829 ; R302.1@86.677,28.448 90.349,24.777 90.349,10.656 P301.6
  Bottom Layer w0.508: U201.11 44.885,10.595 45.847,11.557 v1(47.498,11.557) ; v1(61.404,27.368) C301.1@62.892,27.368 ; R301.1@73.015,27.723 74.922,27.723 76.382,29.184 R303.1 76.571,31.825 ; C307.1@73.333,33.502 v1@73.333,35.026 ; C306.1 73.333,35.153 v1(73.396,35.089) ; C307.1@73.523,33.504 C307.1@73.523,33.692 ; C307.1@73.841,33.502 C307.1@73.841,33.692 ; C307.1@74.031,33.504 75.594,31.941 83.947,31.941 v1(84.582,31.305)
VCC_FB: R411.1 R412.2 U401.3 | length 11.4
  Top Layer w0.305: U401.3 51.206,35.88 51.393,35.693
  Top Layer w0.508: R411.1 52.251,30.644 ; 51.393,35.693 52.06,35.026 52.06,33.474 52.251,33.284 52.251,30.644 ; R412.2 53.584,30.644 52.251,30.644
VCC_OUT: C410.1 C411.1 L402.2 R410.2 R411.2
  other v1: 48.568,30.835 49.52,30.835
VCCH: C101.1 C103.1 C202.1 C414.1 C415.2 L101.5 L401.2 Q401.5 Q401.6 Q401.7 Q401.8 Q403.5 Q403.6 Q403.7 Q403.8 Q405.5 Q405.6 Q405.7 Q405.8 R201.2 R502.2 U201.3 U401.29 | length 61.2
  Top Layer w0.508: R201.2 14.706,33.311 v2(14.732,33.337) ; L101.5@22.299,11.493 C103.1 C103.1@24.447,11.811 ; Q405.6 39.814,50.927 C415.2@40.195,50.546 ; 34.734,44.577 37.084,44.577 v2(37.338,44.323) ; 40.767,48.615 42.455,48.615 42.735,48.895 ; 41.71,49.123 41.719,49.133 41.719,50.102 ; v1(42.1,17.907) 42.607,17.907 44.005,19.306 R502.2
  Top Layer w0.635: C103.1@24.447,11.811 24.447,13.018
  Bottom Layer w0.508: v2@14.668,33.274 v2(14.732,33.337) 16.954,33.337 21.526,28.765 31.742,28.765 v2(32.575,29.599) ; C101.1 39.232,20.955 42.19,17.997 42.19,16.23 ; v2(37.338,44.323) L401.2@38.925,42.735 ; C202.1@41.592,16.192 42.862,16.192 43.615,15.44 U201.3
VCCH_FILT: C407.1 C408.1 L401.1 U401.53 U401.54 | length 12.2
  Top Layer w0.305: U401.53 v2@42.769,36.38
  Top Layer w0.508: 41.067,36.131 42.752,36.131 v2(42.916,36.296)
  Bottom Layer w0.508: L401.1 42.463,36.976 ; 42.735,36.703 42.463,36.976 ; C407.1@44.041,36.976 42.463,36.976
  Bottom Layer w0.762: v2@43.068,36.448 46.353,36.448 C408.1@47.234,37.33 ; C408.1@47.234,37.248 C408.1@47.234,37.33 ; C408.1 C408.1@47.234,37.33
pads on no net: P301.3 P301.5 U201.13 U203.3 U203.6 U203.11 U203.14 U203.15 U301.1 U301.4 U301.9 U301.10 U301.12 U301.13 U301.14 U301.15 U301.16 U301.23 U301.24 U301.27 U301.41 U301.42 U301.43 U301.49 U301.53 U301.54 U301.55 U301.60 U301.61 U301.62 U301.63 U301.64 U401.25 U401.26 U401.55

## Polygon pours and split planes (outlines as drawn)
M_U on Top Layer "Top Layer-No Net" (solid, pour order 18): 30.289,36.767 29.908,37.147 24.638,37.147 24.384,36.894 24.384,32.703 25.082,32.004 25.4,31.686 25.4,30.035 26.797,30.035 26.797,32.322 27.749,33.274 29.4,33.274 30.289,34.163
M_V on Top Layer "Top Layer-No Net" (solid, remove dead copper, pour order 26): 30.289,45.657 29.972,45.974 29.4,45.974 24.447,45.974 24.13,45.657 24.13,40.386 25.4,39.116 26.733,39.116 26.987,39.37 26.987,41.212 27.749,41.974 29.527,41.974 30.289,42.735
NetC409_1 on Top Layer "Top Layer-No Net" (solid, remove dead copper, pour order 24): 39.37,33.159 39.37,31.686 38.408,30.724 38.408,29.311 38.916,28.803 40.63,28.803 41.202,29.374 41.202,30.581 39.805,31.978 39.805,33.248 39.424,33.248
VCC_OUT on Top Layer "Top Layer-No Net" (solid, remove dead copper, pour order 23): 50.155,32.994 50.155,30.708 49.584,30.136 49.584,26.009 48.06,26.009 48.06,30.898 48.631,31.47 48.631,32.994
VCCH on Top Layer "Top Layer-No Net" (solid, pour order 25): 39.433,51.101 39.513,51.181 44.196,51.181 44.196,50.022 42.408,48.234 40.821,48.234 39.433,49.621
M_W on Top Layer "Top Layer-No Net" (solid, pour order 20): 29.337,54.483 24.701,54.483 24.384,54.165 24.384,50.038 25.336,49.085 25.336,47.053 26.86,47.053 26.86,48.45 26.987,48.578 26.987,49.784 27.813,50.609 29.464,50.609 30.226,51.371 30.226,54.292 30.019,54.5
VCCH on Top Layer "Top Layer-No Net" (solid, remove dead copper, pour order 17): 19.431,11.239 19.431,13.716 21.336,13.716 32.194,24.574 32.194,31.75 32.194,53.213 32.956,53.975 34.861,53.975 34.861,22.923 24.257,12.319 23.177,11.239
GND on Top Layer "Top Layer-No Net" (solid, remove dead copper, pour order 16): 0.381,56.642 92.202,56.642 92.202,0.635 92.202,0.191 0.445,0.191
VCC_OUT on Bottom Layer "Top Layer-No Net" (solid, remove dead copper, pour order 22): 45.91,33.21 45.91,27.596 46.837,27.596 49.911,30.67 49.911,30.988 49.652,31.247 49.144,31.247 49.075,31.316 47.181,33.21
M_U on Bottom Layer "Top Layer-No Net" (solid, pour order 19): 30.289,36.83 30.289,34.163 29.654,33.528 25.781,33.528 24.892,32.639 22.733,32.639 19.367,36.005 13.906,36.005 13.843,36.068 13.779,36.131 13.779,37.846 13.906,37.973 14.224,37.973 21.082,37.973 21.971,37.084 30.035,37.084
M_W on Bottom Layer "Top Layer-No Net" (solid, pour order 21): 13.843,47.117 13.843,46.799 14.414,46.228 17.843,46.228 21.526,49.911 26.987,49.911 28.003,50.927 29.908,50.927 30.289,51.308 30.289,54.292 29.972,54.61 23.622,54.61 22.542,53.53 17.018,48.006 16.954,47.942 14.668,47.942 14.414,47.942 13.843,47.371
M_V on Bottom Layer "Top Layer-No Net" (solid, remove dead copper, pour order 15): 14.275,42.862 21.336,42.862 24.384,45.91 29.972,45.91 30.289,45.593 30.289,42.735 30.099,42.545 28.511,42.545 25.908,39.941 24.511,39.941 23.304,41.148 13.97,41.148 13.525,41.593 13.525,42.354 14.034,42.863
GND on Bottom Layer "Top Layer-No Net" (solid, remove dead copper, pour order 14): -0.01,57.277 -0.01,0.317 92.573,0.317 92.573,57.277

## Keep-outs
Keep-Out Layer:
  circle w0.254: c3.937,53.467 r2.4
  circle w0.254: c30.162,5.334 r2.4
  circle w0.254: c62.611,5.334 r2.4
  circle w0.254: c64.834,51.181 r2.4
  rectangle: 0,0 92.583,0.5
  rectangle: 92.075,0 92.583,56.959
  rectangle: 0,56.451 92.583,56.959
  rectangle: 0,0 0.5,56.959

## Other copper
Top Layer:
  text "PREN2, ET-Gruppe" at 75.489,53.785 h0.76
  text "daniw & ystuder 11.3.2015" at 72.136,52.413 h0.76
  text "V.2" at 80.264,51.041 h0.76

## Silkscreen, mask and mechanical layers (free items; w line width, h text height)
Mechanical 1:
  the board outline again, w0.076

## Text inside footprints (layer, text, board x,y; h text height)
C101: Top Overlay "+" at 31.813,19.558 h1.5 r180
P103: Top Overlay "1" at 86.868,46.609 h1.27 r180; Top Overlay "2" at 87.376,44.069 h1.27 r180; Top Overlay "5" at 78.232,46.609 h1.27 r180; Top Overlay "6" at 78.232,44.069 h1.27 r180
P301: Top Overlay "1" at 84.645,15.113 h1.27 r270; Top Overlay "2" at 87.185,15.621 h1.27 r270; Top Overlay "5" at 84.645,6.477 h1.27 r270; Top Overlay "6" at 87.185,6.477 h1.27 r270